# Altium PCB STM8_DEVELOPMENT_BOARD.PcbDoc
Units mil, origin at the board's own origin, x right, y up, seen from the top; angles counter-clockwise.
Board outline 1000 x 1450 mil, 2 copper layers (Top Layer, Bottom Layer); 15 components, 23 nets, 76 pads, 10 vias.
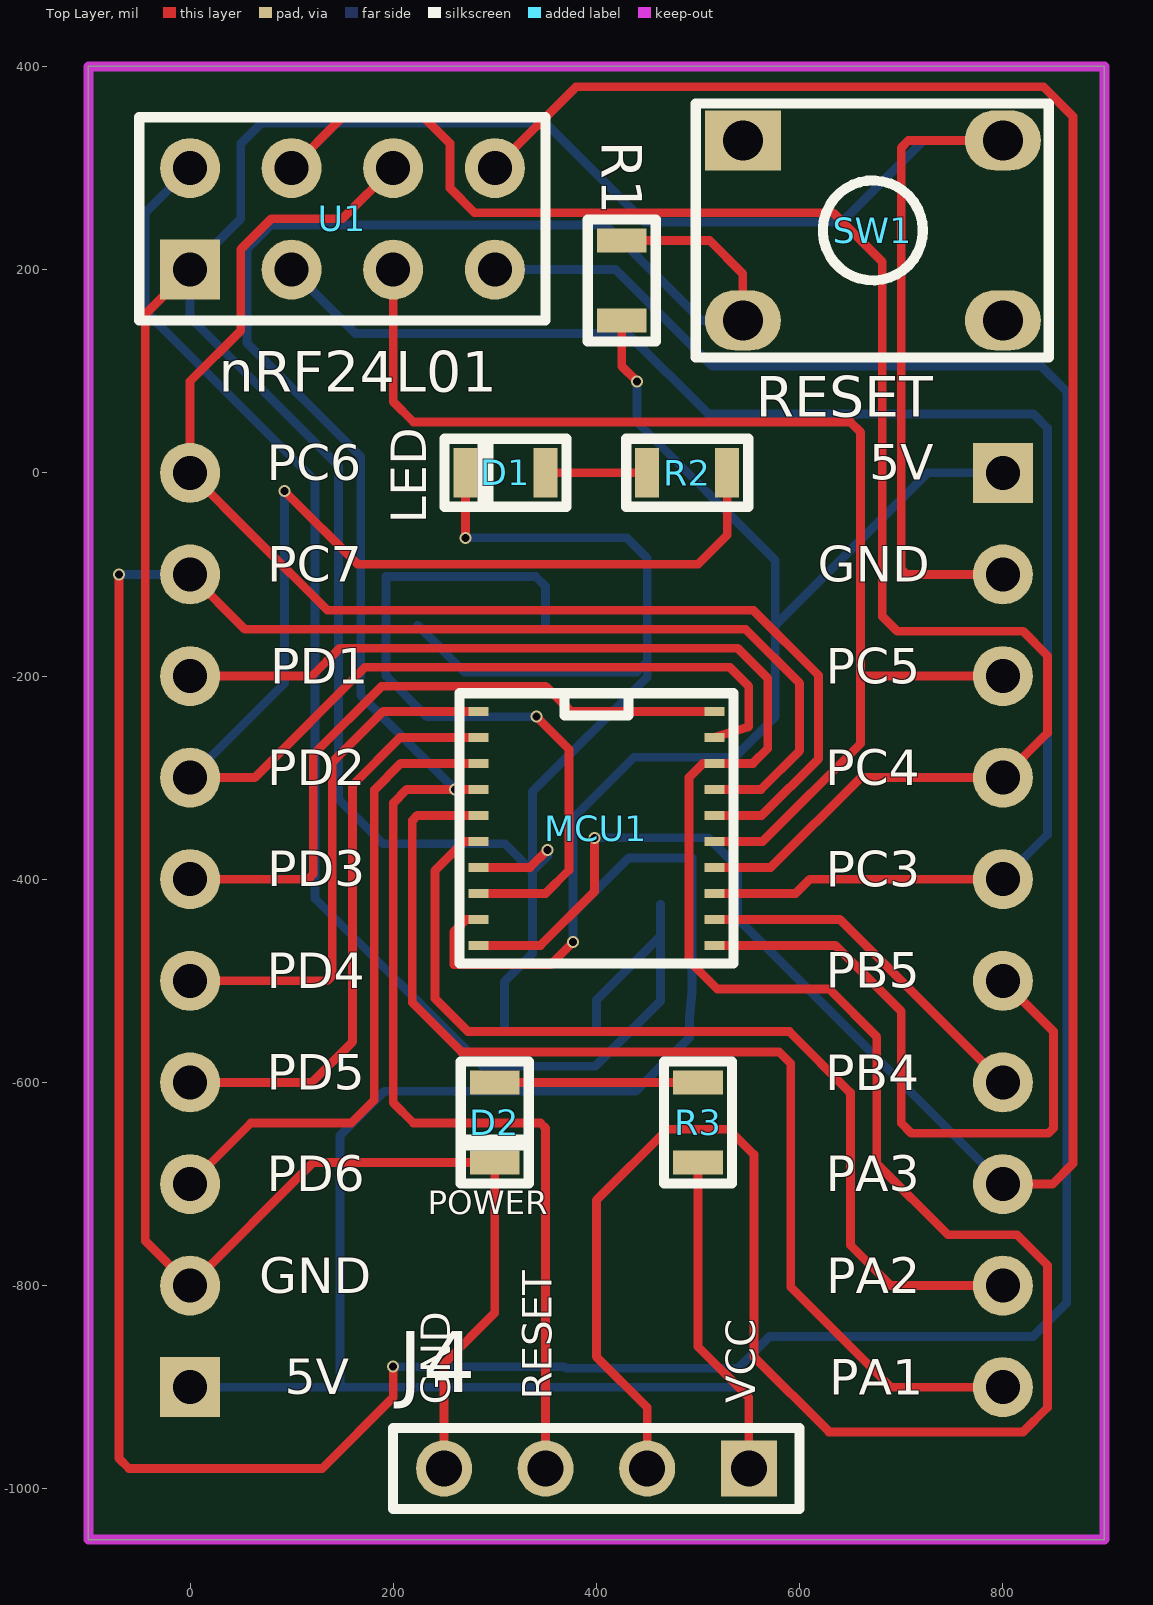
[diagram p0: Top Layer view]
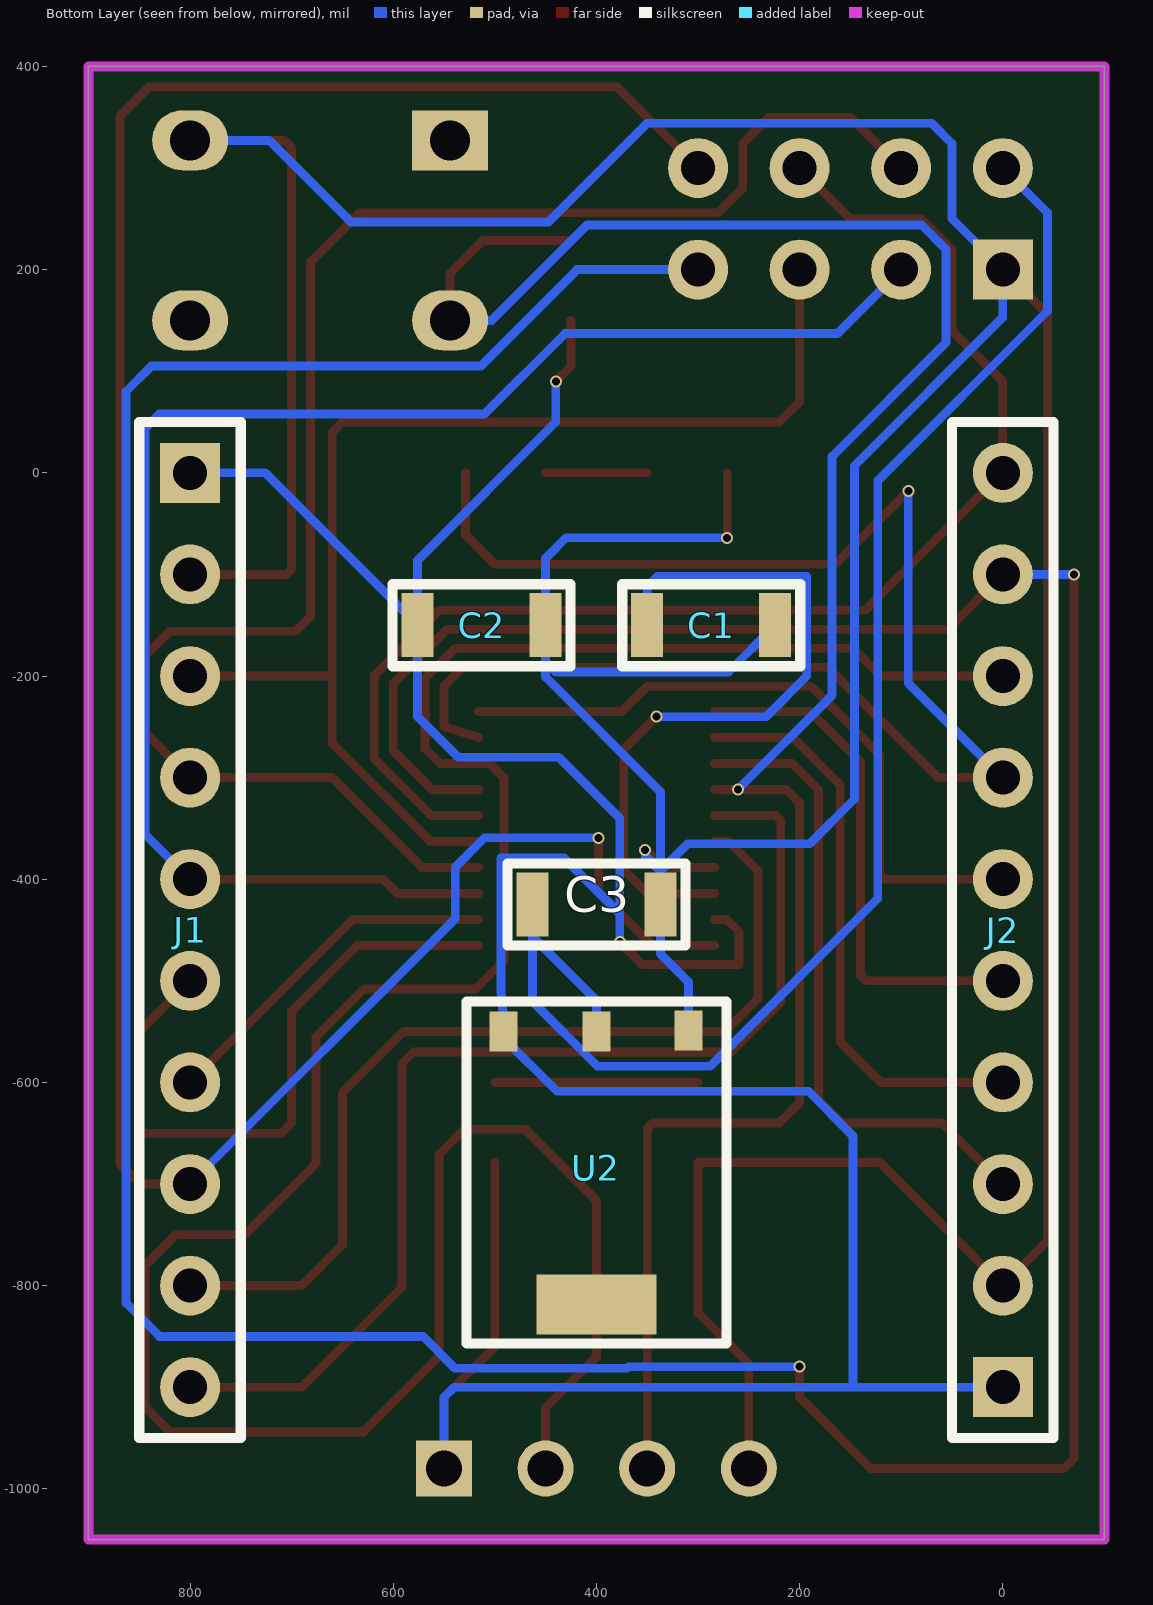
[diagram p1: Bottom Layer view, seen from below]

## Layer stack, top to bottom
Top Solder: solder mask 0.4, Solder Resist, Dk 3.5
Top Layer: signal copper 1.4
Dielectric 1: dielectric 12.6, FR-4, Dk 4.8
Bottom Layer: signal copper 1.4
Bottom Solder: solder mask 0.4, Solder Resist, Dk 3.5

## Board outline
-100,-1050 900,-1050 900,400 -100,400

## Design rules (kind name [scope] priority, off if disabled: settings)
Clearance [All] p1: gap=10 ignorepadtopadclearanceinfootprint=FALSE except(0: Arc-Hole Track-Hole SMDPad-Hole THPad-Hole Via-Hole Fill-Hole Poly-Hole Region-Hole Text-Hole)
PolygonConnect [All] p1: connectstyle=Relief reliefconductorwidth=10 reliefentries=4 polygonreliefangle="90 Angle" airgapwidth=10
RoutingVias [All] p1: holewidth=7.87 width=11.81 viastyle="Through Hole" minholewidth=7.87 minwidth=11.81 maxholewidth=7.87 maxwidth=11.81
SolderMaskExpansion [All] p1: expansion=4 istentingtop=FALSE
Width [All] p1: maxlimit=10 minlimit=8.66 preferedwidth=8.66
30 further rules are at their usual default settings.

## Components (designator, comment, footprint, x,y, rotation, side; value= is the part's Value field where it differs from the comment)
C1 "104" C1206 287.01,-150 r0 bottom
C2 "105" C1206 512.99,-150 r0 bottom
C3 "104" C1206 400,-425 r0 bottom
D1 "LED" L0805RED 310.63,24.6 r180 top
D2 "POWER" L0805RED 275.4,-639.37 r270 top
J1 "Header 10x1 TH Pitch 2.54mm" "Header 10x1 TH Pitch 2.54mm" 800,-450 r270 bottom
J2 "Header 10x1 TH Pitch 2.54mm" "Header 10x1 TH Pitch 2.54mm" 0,-450 r90 bottom
J4 "SWIM" "HEADER 2_54 HORIZONTAL 4X" 450,-780 r180 top
MCU1 "STM8S003F3P6" TSSOP20_0.65_4.4 400,-350 r0 top
R1 "10k" R0805 425,150 r270 top
R2 "10k" R0805 528.74,0 r0 top
R3 "10k" R0805 500,-678.74 r270 top
SW1 "RESET" BUTTON_HOLE_5.0mm 672.05,238.58 r90 top
U1 "nRF24L01" "Header 4x2 TH Pitch 2.54mm" 150,250 r90 top
U2 "AMS1117" SOT223-3 400,-685.83 r0 bottom

## Footprints (in the part's own frame and the unit in brackets; to place one, negate y for a bottom-side part, rotate by r counter-clockwise, add the part's x,y. Pads: shape width x height; smd on the part's side, far side on the other; paste and mask are expansions set on the pad)
BUTTON_HOLE_5.0mm [mm]
  rect 1.5x1.9 hole 1: 1(2.25,3.25)
  oval 1.5x1.9 hole 1: 2(2.25,-3.25) 3(-2.25,3.25) 4(-2.25,-3.25)
  silkscreen extent -3.18,-4.4 3.17,4.43, body extent -3,-3.86 3,3.86, height 5
C1206 [mm]
  rect 0.8x1.6 smd: 1(-1.6,0) 2(1.6,0)
  silkscreen extent -2.22,-1.02 2.22,1.02, body extent -1.6,-0.8 1.6,0.8, height 0.75
"HEADER 2_54 HORIZONTAL 4X" [mm]
  rect 1.4x1.4 hole 0.9: 1(-2.54,5.08)
  round 1.4 hole 0.9: 2(0,5.08) 3(2.54,5.08) 4(5.08,5.08)
  silkscreen extent -3.81,4.06 6.35,6.1, body extent -3.81,4.68 6.35,15, height 2.75
"Header 4x2 TH Pitch 2.54mm" [mm]
  rect 1.5x1.5 hole 0.85: 1(-1.27,3.81)
  round 1.5 hole 0.85: 2(1.27,3.81) 3(-1.27,1.27) 4(1.27,1.27) 5(-1.27,-1.27) 6(1.27,-1.27) 7(-1.27,-3.81) 8(1.27,-3.81)
  silkscreen extent -2.54,-5.08 2.54,5.08, body extent -2.54,-5.08 2.54,5.08, height 8.89
"Header 10x1 TH Pitch 2.54mm" [mm]
  rect 1.5x1.5 hole 0.85: 1(-11.43,0)
  round 1.5 hole 0.85: 2(-8.89,0) 3(-6.35,0) 4(-3.81,0) 5(-1.27,0) 6(1.27,0) 7(3.81,0) 8(6.35,0) 9(8.89,0) 10(11.43,0)
  silkscreen extent -12.7,-1.27 12.7,1.27, body extent -12.7,-1.27 12.7,1.27, height 8.89
L0805RED [mm]
  rect 0.6x1.24 smd: 1(-1,0.625) 2(1,0.625)
  silkscreen extent -1.53,-0.23 1.53,1.47, body extent -1,0 1,1.25, height 1.1
R0805 [mm]
  rect 0.6x1.24 smd: 1(-2,0) 2(0,0)
  silkscreen extent -2.53,-0.85 0.53,0.85, body extent -2,-0.62 0,0.62, height 0.45
SOT223-3 [mm]
  rect 0.7x1 smd: 1(-2.3,-3.475) 2(0,-3.45) 3(2.325,-3.45)
  rect 3x1.5 smd: 4(0,3.375)
  silkscreen extent -3.25,-4.2 3.25,4.35, body extent -3.25,-3.5 3.25,3.5, height 1.7
TSSOP20_0.65_4.4 [mm]
  rect 0.5x0.22 smd: 1(-2.95,2.925) 2(-2.95,2.275) 3(-2.95,1.625) 4(-2.95,0.975) 5(-2.95,0.325) 6(-2.95,-0.325) 7(-2.95,-0.975) 8(-2.95,-1.625) 9(-2.95,-2.275) 10(-2.95,-2.925) 11(2.95,-2.925) 12(2.95,-2.275) 13(2.95,-1.625) 14(2.95,-0.975) 15(2.95,-0.325) 16(2.95,0.325) 17(2.95,0.975) 18(2.95,1.625) 19(2.95,2.275) 20(2.95,2.925)
  silkscreen extent -3.42,-3.38 3.42,3.38, body extent -3.14,-3.25 3.14,3.25, height 1.09

## Part data
C1 C2 C3: library part C1206
D1 D2: library part LED0805
J4: library part "Header 4x1 TH Pitch 2.54mm"
R1 R2 R3: library part "Resistor SMD"
SW1: library part "Button Hole"
U1: library part "Header 4x2 TH Pitch 2.54mm"
U2: library part AMS1117(SOT-223)

## Via types
v1: diameter 11.81, hole 7.87, Top Layer to Bottom Layer, tented both sides, 9 vias
v2: diameter 11.81, hole 7.87, Top Layer to Bottom Layer, 1 vias

## Nets (pads, with @x,y where several pads share a name; then routed paths per layer and width w, separated by ;. In a path a pad name is that pad's centre, name@x,y a point inside that pad or via, vN(x,y) a via of type N, cw(c..) or ccw(c..) an arc to the next point about the centre after c; other vN are vias at no path point)
GND: C1.1 C2.1 C3.1 D1.2 D2.2 J1.2 J2.2 J4.4 MCU1.7 SW1.2 U1.1 U2.1 | length 5227.9
  Top Layer w8.66: U1.1 -44,156 -44,-756 J2.2 121.26,-678.74 D2.2 300,-826.87 250,-876.87 J4.4@250,-975 ; v1(271.26,-64) D1.2 ; MCU1.7 334.61,-388.39 v1(352,-371) ; J1.2 705.07,-100 700,-94.93 700,320 707.17,327.17 SW1.2
  Bottom Layer w8.66: C1.1 270.02,-196 440,-196 450,-186 ; v1(271.26,-64) 430,-64 450,-84 C2.1 450,-186 ; U2.1 309.45,-501 337.01,-473.44 C3.1 337.01,-392.01 ; v1(352,-371) 352,-377.02 337.01,-392.01 ; SW1.2 722,327.17 641.83,247 447,247 350,344 70,344 50,324 50,250 U1.1 0,153 146,7 146,-321 190,-365 310,-365 337.01,-392.01 ; 337.01,-392.01 337.01,-313.99 450,-201 450,-186
NetC1_2: C1.2 MCU1.8 | length 724.6
  Top Layer w8.66: MCU1.8 350,-413.98 373,-390.98 373,-272 v1(341,-240)
  Bottom Layer w8.66: v1(341,-240) 233,-240 193,-200 193,-102 340,-102 350,-112 C1.2
NetC3_2: C3.2 U1.2 U2.2 | length 1456.3
  Bottom Layer w8.66: U1.2 -44,256 -44,159.33 123,-7.67 123,-419 288,-584 398.99,-584 462.99,-520 C3.2@462.99,-456.01 ; U2.2 400,-519 C3.2@462.99,-456.01 ; C3.2 C3.2@462.99,-456.01
NetD1_1: D1.1 R2.1 | length 100
  Top Layer w8.66: D1.1 R2.1
NetD2_1: D2.1 R3.1 | length 200
  Top Layer w8.66: D2.1 R3.1
PA1: J1.10 MCU1.5 | length 1113.4
  Top Layer w8.66: MCU1.5 223.74,-337.2 218.66,-342.28 218.66,-521.34 267.32,-570 580,-570 591.34,-581.34 591.34,-801.34 690,-900 J1.10
PA2: J1.9 MCU1.6 | length 944.3
  Top Layer w8.66: MCU1.6 270,-362.8 241.02,-391.77 241.02,-517.31 273.71,-550 590,-550 650,-610 650,-760 690,-800 J1.9
PA3: J1.8 MCU1.10 U1.8 | length 2484.4
  Top Layer w8.66: MCU1.10 345,-465.16 398,-412.16 v1(398,-359.22) ; U1.8 379.99,380 840,380 869,351 869,-680 849,-700 J1.8
  Bottom Layer w8.66: v1(398,-359.22) 510.1,-359.22 539,-388.12 539,-439 J1.8
PB4: J1.7 MCU1.12 | length 350.3
  Top Layer w8.66: MCU1.12 639.57,-439.57 J1.7
PB5: J1.6 MCU1.11 | length 642.6
  Top Layer w8.66: MCU1.11 635.16,-465.16 700,-530 700,-640 710,-650 844.93,-650 850,-644.93 850,-550 J1.6
PC3: J1.5 MCU1.13 U1.3 | length 1560.5
  Top Layer w8.66: MCU1.13 596.02,-413.98 610,-400 J1.5
  Bottom Layer w8.66: U1.3 163,137 430.92,137 509.92,58 830,58 844,44 844,-356 J1.5
PC4: J1.4 MCU1.14 U1.4 | length 1673.2
  Top Layer w8.66: U1.4 149.99,350 230,350 256,324 256,280 280,256 633,256 681.34,207.66 681.34,-141.34 696,-156 820,-156 844,-180 844,-256 J1.4 660,-300 571.61,-388.39 MCU1.14
PC5: J1.3 MCU1.15 U1.5 | length 1232.6
  Top Layer w8.66: U1.5 199.99,70.01 220,50 571,50 650,50 660,40 660,-39 660,-200 ; MCU1.15 563.6,-362.8 660,-266.39 660,-200 ; J1.3 660,-200
PC6: J2.10 MCU1.16 U1.6 | length 1332.6
  Top Layer w8.66: U1.6 149.99,250 80,250 50,220 50,140 0,90 J2.10 64.23,-64.23 135.36,-135.35 554.53,-135.35 618.66,-199.49 618.66,-281.34 562.8,-337.2 MCU1.16
PC7: J2.9 MCU1.17 U1.7 | length 4283.8
  Top Layer w8.66: v1(-70,-100) -70,-970 -60,-980 130,-980 200,-910 v1(200,-879.76) ; J2.9 54.02,-154.02 546.8,-154.02 600,-207.22 600,-273.61 561.99,-311.61 MCU1.17
  Bottom Layer w8.66: v1(-70,-100) J2.9 ; v1(200,-879.76) 368.43,-879.76 370,-881.34 539.33,-881.34 570.67,-850 830,-850 863,-817 863,80 838,105 514,105 418.99,200.01 U1.7
PD1: J2.8 J4.2 MCU1.18 | length 2624
  Top Layer w8.66: J2.8 120,-200 147.32,-172.68 539.07,-172.68 568.66,-202.27 568.66,-271.34 553.98,-286.02 MCU1.18 504.98,-286.02 491,-300 491,-480 519,-508 629,-508 676,-555 676,-680 746,-750 814,-750 844,-780 844,-920 820,-944 629,-944 555,-870 555,-671 530,-646 470,-646 400,-716 400,-870 450,-920 J4.2@450,-975
PD2: J2.7 MCU1.19 R2.2 | length 1537.4
  Top Layer w8.66: J2.7 63.61,-300 172.27,-191.34 531.34,-191.34 550,-210 550,-250 MCU1.19 ; v1(93,-18) 165,-90 500,-90 528.74,-61.26 R2.2
  Bottom Layer w8.66: J2.7 93,-207 v1(93,-18)
PD3: J2.6 MCU1.20 | length 674.1
  Top Layer w8.66: J2.6 116.26,-400 121.34,-394.93 121.34,-277.27 188.61,-210 350,-210 374.84,-234.84 MCU1.20
PD4: J2.5 MCU1.1 | length 516.7
  Top Layer w8.66: J2.5 134.93,-500 140,-494.93 140,-285 190.16,-234.84 MCU1.1
PD5: J2.4 MCU1.2 | length 572.6
  Top Layer w8.66: J2.4 120,-600 160,-560 160,-307.22 206.79,-260.43 MCU1.2
PD6: J2.3 MCU1.3 | length 634
  Top Layer w8.66: J2.3 60,-640 158.66,-640 181.34,-617.32 181.34,-312.27 207.58,-286.02 MCU1.3
RESET: J4.3 MCU1.4 R1.1 SW1.3 | length 2206.6
  Top Layer w8.66: MCU1.4 v1(260.61,-311.61) 213.46,-311.61 200,-325.07 200,-620 220,-640 344.93,-640 350,-645.07 J4.3@350,-975 ; R1.1 511.26,228.74 544.09,195.91 SW1.3
  Bottom Layer w8.66: v1(260.61,-311.61) 168,-219 168,16 56,128 56,220 80,244 409,244 503,150 SW1.3
VCC: C2.2 J1.1 J2.1 J4.1 MCU1.9 R1.2 R3.2 U2.3 | length 3173.4
  Top Layer w8.66: MCU1.9 272,-439.57 259.68,-451.88 259.68,-484 355,-484 v1(377,-462) ; R1.2 425,105 v2(440,90) ; R3.2 500,-860 550,-910 J4.1@550,-975
  Bottom Layer w8.66: J2.1 147.54,-900 ; v1(377,-462) 377,-434 ; v2(440,90) 440,50 575.98,-85.98 C2.2 ; J4.1@550,-975 550,-910 540,-900 147.54,-900 ; J1.1 725.98,0 C2.2 ; 147.54,-900 147.54,-652.46 191.23,-608.77 438.77,-608.77 491.54,-556 U2.3 491.54,-537 494,-510.54 494,-379 432,-379 377,-434 ; 377,-434 377,-340 437,-280 535.98,-280 575.98,-240 C2.2
pads on no net: SW1.1 SW1.4 U2.4

## Keep-outs
Keep-Out Layer:
  the board outline again, w9.84

## Silkscreen, mask and mechanical layers (free items; w line width, h text height)
Top Overlay:
  text "PC6" at 75.72,-19.2 h60
  text "5V" at 668.36,-18.84 h60
  text "PC7" at 75.97,-119.23 h60
  text "GND" at 618,-119.2 h60
  text "PD1" at 79.16,-219.31 h60
  text "PC5" at 625.58,-219.2 h60
  text "PD2" at 76.13,-319.31 h60
  text "PC4" at 625.38,-319.23 h60
  text "PD3" at 75.94,-418.95 h60
  text "PC3" at 625.94,-419.2 h60
  text "PD4" at 75.38,-519.29 h60
  text "PB5" at 625.58,-518.84 h60
  text "PD5" at 75.58,-618.84 h60
  text "PB4" at 625.38,-619.29 h60
  text "PD6" at 75.72,-718.95 h60
  text "PA3" at 625.94,-718.95 h60
  text "GND" at 68,-819.2 h60
  text "PA2" at 626.13,-819.31 h60
  text "RESET" at 365.99,-912.37 h50 r90
  text "VCC" at 566.01,-915.99 h50 r90
  text "GND" at 265.99,-917.45 h50 r90
  text "5V" at 93.36,-918.84 h60
  text "PA1" at 629.16,-919.31 h60